# Altium PCB USB-NST.PcbDoc
Units mil, origin at the board's own origin, x right, y up, seen from the top; angles counter-clockwise.
Board outline 1496.06 x 1255.91 mil, 2 copper layers (Top Layer, Bottom Layer); 37 components, 0 nets, 180 pads, 40 vias.
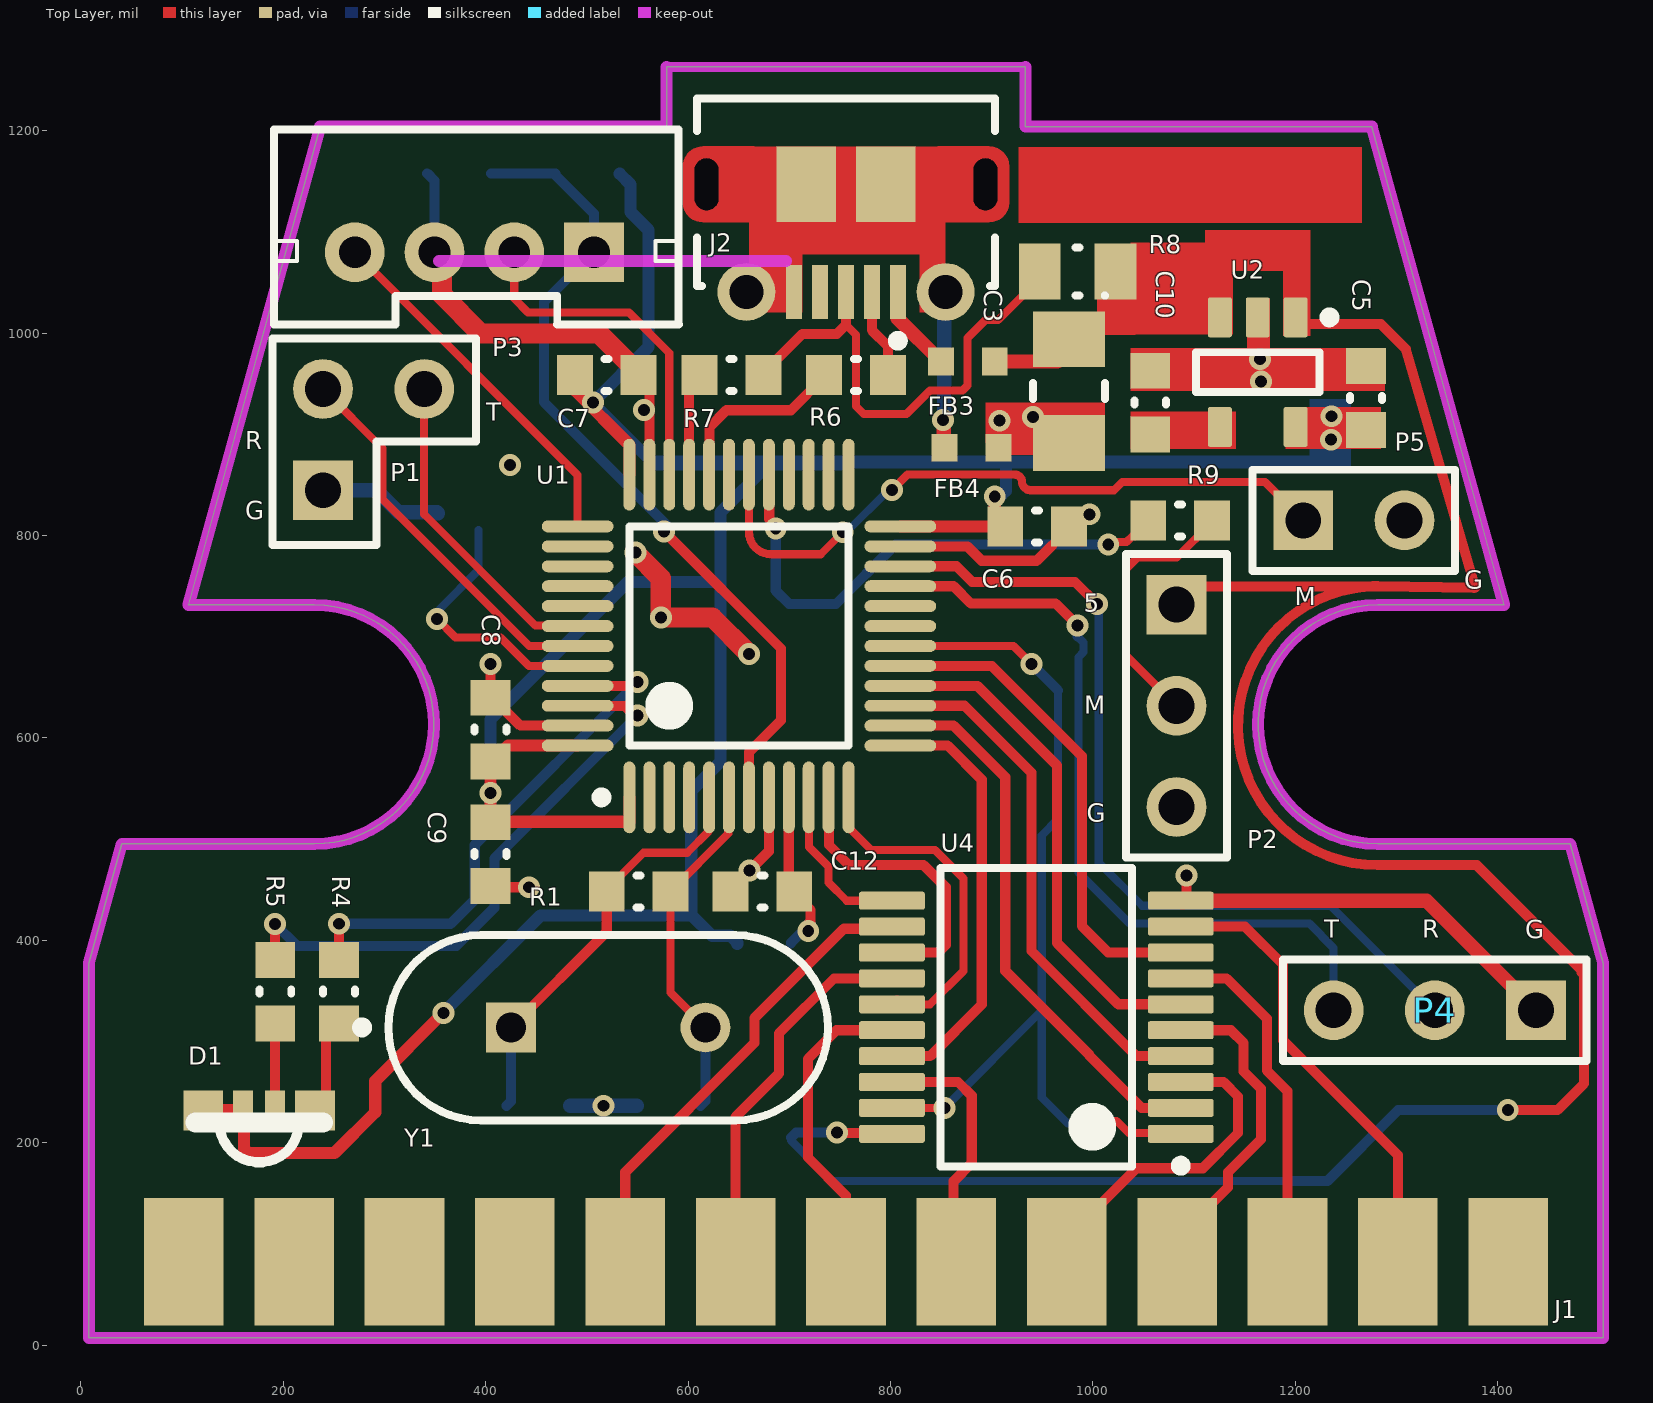
[diagram p0: Top Layer view]
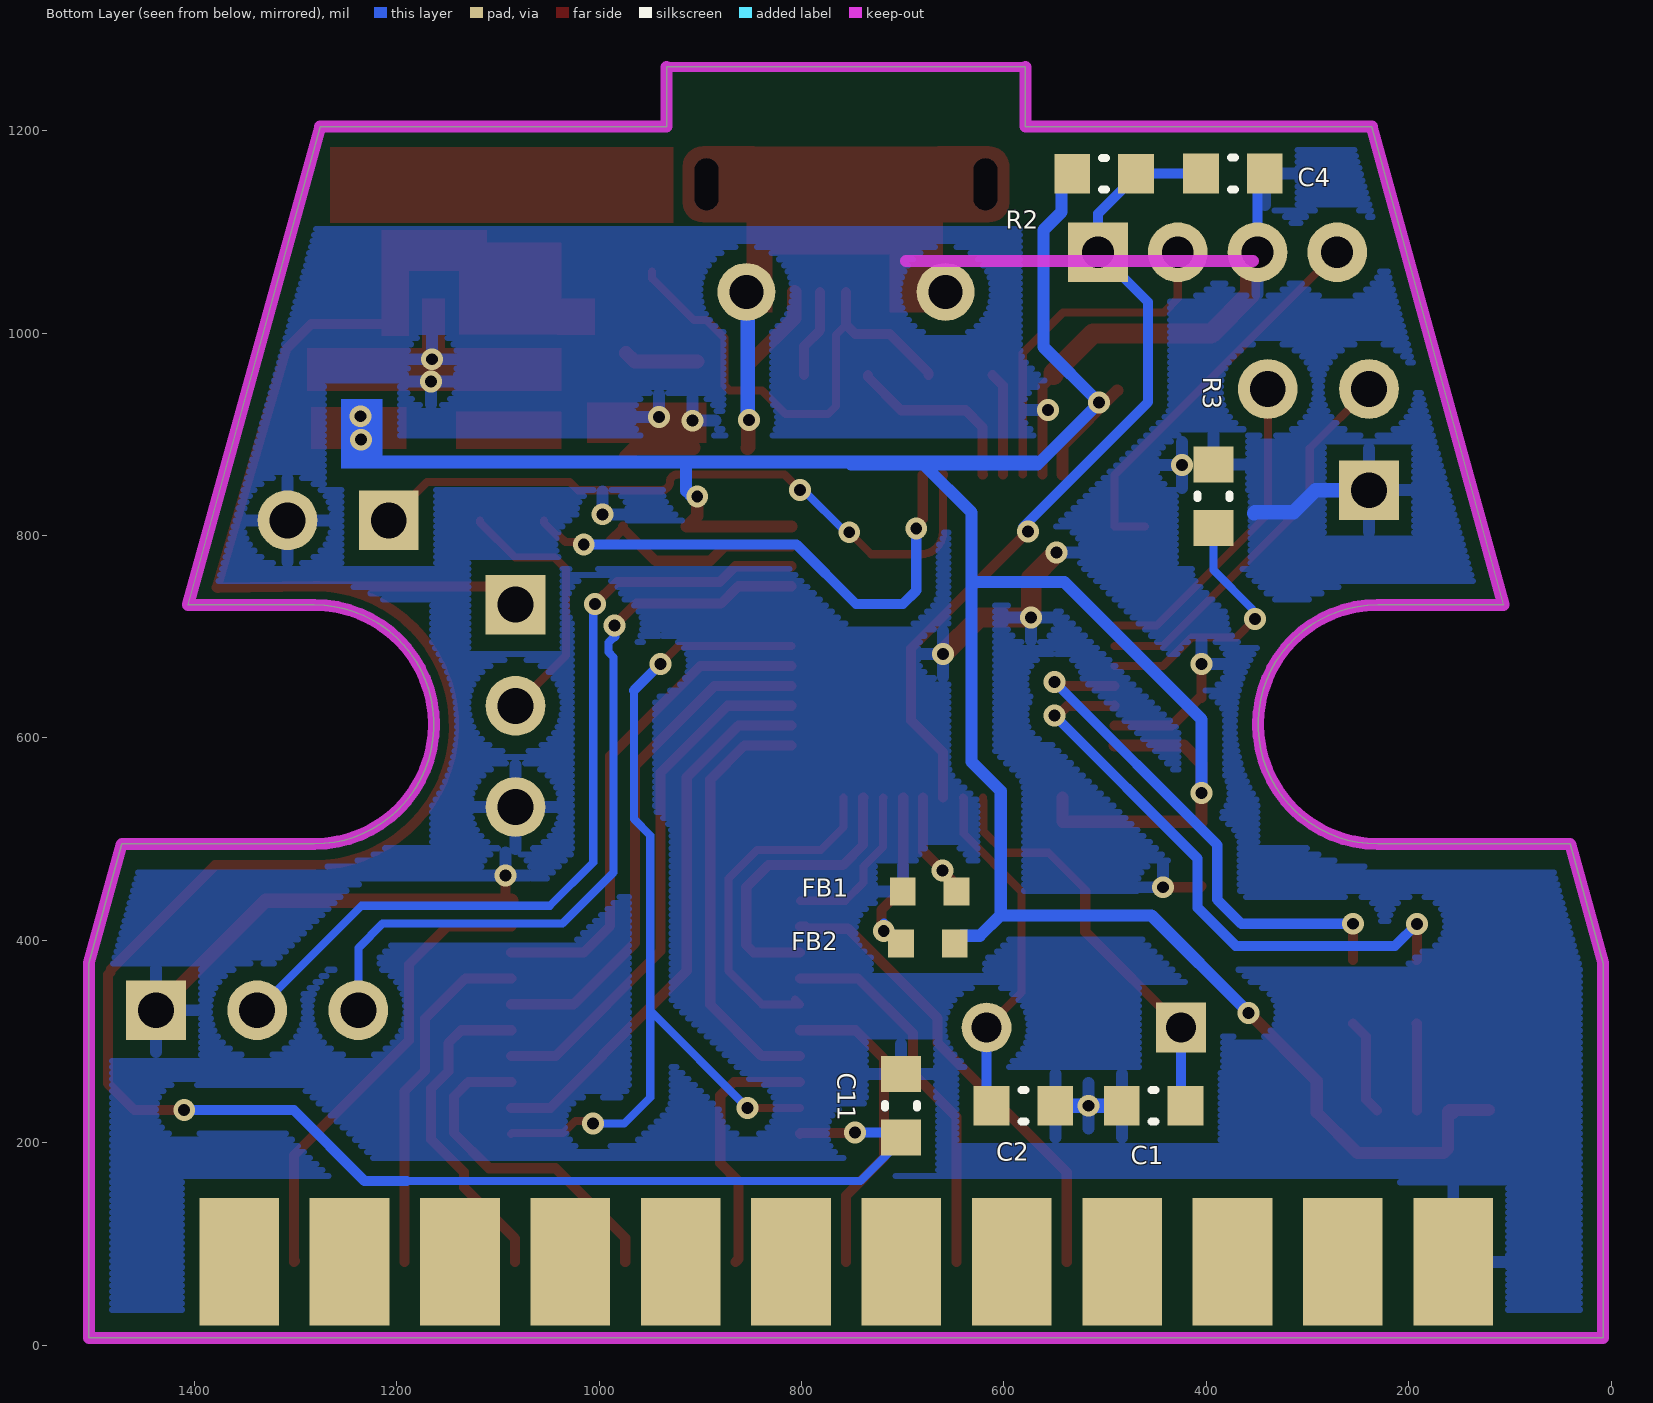
[diagram p1: Bottom Layer view, seen from below]

## Layer stack, top to bottom
Top Solder: solder mask 0.4, Solder Resist, Dk 3.5
Top Layer: signal copper 1.4
Dielectric 1: dielectric 12.6, FR-4, Dk 4.8
Bottom Layer: signal copper 1.4
Bottom Solder: solder mask 0.4, Solder Resist, Dk 3.5

## Board outline
7.99,7.1 7.99,377.18 40.61,495.29 230.71,495.29 ccw(c230.71,613.4) 230.71,731.51 106.33,731.51 236.34,1203.95 236.34,1204.14 578.86,1204.14 578.86,1263.01 933.19,1263.01 933.19,1203.95 1275.71,1203.95 1406.19,731.51 1281.33,731.51 ccw(c1281.33,613.4) 1281.33,495.29 1471.43,495.29 1504.05,377.18 1504.05,7.1

## Design rules (kind name [scope] priority, off if disabled: settings)
Clearance [All] p1: gap=10 ignorepadtopadclearanceinfootprint=FALSE except(0: Arc-Hole Track-Hole SMDPad-Hole THPad-Hole Via-Hole Fill-Hole Poly-Hole Region-Hole Text-Hole)
PolygonConnect [All] p1: connectstyle=Relief reliefconductorwidth=10 reliefentries=4 polygonreliefangle="90 Angle" airgapwidth=10
RoutingVias [All] p1: holewidth=28 width=50 viastyle="Through Hole" minholewidth=28 minwidth=50 maxholewidth=28 maxwidth=50
SolderMaskExpansion [All] p1: expansion=4 istentingtop=FALSE
Width [All] p1: maxlimit=10 minlimit=10 preferedwidth=10
30 further rules are at their usual default settings.

## Components (designator, comment, footprint, x,y, rotation, side; value= is the part's Value field where it differs from the comment)
C1 "CAP 22pF" CAPC0603(1608)100_N 452.03,236.59 r0 bottom value=22pF
C2 "CAP 22pF" CAPC0603(1608)100_N 580.72,236.59 r180 bottom value=22pF
C3 "TAJA106K016RNJ" CAPMP3217X18-T_V 976.34,942.67 r270 top
C4 "CAP 1uF 25V" CAPC0603(1608)100_N 373.69,1157.88 r0 bottom value=1uF
C5 "CAP 2.2uF 16V" CAPC0603(1608)55_N 1269.68,935.85 r270 top value=2.2uF
C6 "CAP 100nF 6.3V" CAPC0603(1608)100_N 944.84,808.98 r180 top value=100nF
C7 "CAP 100nF 6.3V" CAPC0603(1608)100_N 519.57,958.55 r180 top value=100nF
C8 "CAP 100nF 6.3V" CAPC0603(1608)100_N 404.67,608.27 r270 top value=100nF
C9 "CAP 100nF 6.3V" CAPC0603(1608)100_N 404.67,485.27 r90 top value=100nF
C10 "CAP 10nF 16V" CAPC0603(1608)100_N 1056.66,931.28 r270 top value=10nF
C11 "CAP 100nF 6.3V" CAPC0603(1608)100_N 701.68,236.59 r270 bottom value=100nF
C12 "CAP 100nF 6.3V" CAPC0603(1608)100_N 673.34,448.16 r0 top value=100nF
D1 "Bi-Color LED" LED_Bi_Color_1204 176.11,220.01 r270 top
FB1 "BLM18PG600SN1J" MURA-BLM18PG_KG-CHIP-2_V2 673.34,448.16 r0 bottom
FB2 "BLM18PG600SN1J" MURA-BLM18PG_KG-CHIP-2_V2 675.11,396.72 r0 bottom
FB3 "BLM18PG600SN1J" MURA-BLM18PG_KG-CHIP-2_V2 876.41,971.87 r180 top
FB4 "BLM18PG600SN1J" MURA-BLM18PG_KG-CHIP-2_V2 880,886.76 r180 top
J1 "D Connector 25" DB25-EDGE-Female-S 756.02,82.3 r0 top
J2 "105017-0001" USB-MICRO-B_V 756.02,1093.86 r180 top locked
P1 "Header 4" PH2.0-LI-4P 388.83,1079.92 r180 top
P2 "Header 3" HDR1X3#1 1082.59,731.72 r270 top
P3 "MHDR1X3" HDR1X3#2 439.24,944.79 r180 top
P4 "Header 3" HDR1X3#1 1437.85,330.92 r180 top
P5 "Header 2" HDR1X2 1207.79,815 r0 top
R1 "1M 1%" RESC0603(1608)_N 551.06,448.16 r180 top value="1000000.00 Ohm"
R2 "10K 1% 0603(1608)" RESC0603(1608)_N 500.93,1157.46 r0 bottom value="10000.00 Ohm"
R3 "10K 1%" RESC0603(1608)_N 393.07,838.82 r270 bottom value="10000.00 Ohm"
R4 "1K 1%" RESC0603(1608)_N 255,349.25 r270 top value="1000.00 Ohm"
R5 "1K 1%" RESC0603(1608)_N 192.13,349.25 r270 top value="1000.00 Ohm"
R6 "27R 1%" RESC0603(1608)_N 765.87,958.55 r0 top value="27.00 Ohm"
R7 "27R 1%" RESC0603(1608)_N 642.89,958.55 r0 top value="27.00 Ohm"
R8 "1K5 1%" RESC0805(2012)_N 984.92,1061 r0 top value="1500.00 Ohm"
R9 "100R 1%" RESC0603(1608)_N 1086.12,815 r0 top value="100.00 Ohm"
U1 "STM32F103C8T6" STM-LQFP48_N 650.29,700.71 r90 top
U2 "LP2985A-33DBVT" DBV0005A_N 1162.85,961.43 r270 top
U4 "SN74HCT244DBR" DB0020A_N 944.09,324.02 r180 top
Y1 "ADA2214" ADAI-THHF-49S3 521.02,313.95 r0 top

## Footprints (in the part's own frame and the unit in brackets; to place one, negate y for a bottom-side part, rotate by r counter-clockwise, add the part's x,y. Pads: shape width x height; smd on the part's side, far side on the other; paste and mask are expansions set on the pad)
ADAI-THHF-49S3 [mm] "THD, 2-Leads, Body 11.05x4.65mm, Pitch 4.88mm"
  rect 1.25x1.25 hole 0.75: 1(-2.44,0)
  round 1.25 hole 0.75: 2(2.44,0)
  silkscreen extent -6.3,-2.34 5.52,2.33, body extent -5.53,-2.34 5.53,2.33, height 3.5
CAPC0603(1608)55_N [mm] "Chip Capacitor, Body 1.6x0.8mm, Height 0.55mm, IPC Medium Density"
  rect 0.9x1 smd: 1(-0.8,0) 2(0.8,0)
  silkscreen extent -0.05,-0.4 0.05,0.4, body extent -0.87,-0.48 0.88,0.47, height 0.55
CAPC0603(1608)100_N [mm] "Chip Capacitor, Body 1.6x0.8mm, Height 1.0mm, IPC Medium Density"
  rect 0.9x1 smd: 1(-0.8,0) 2(0.8,0)
  silkscreen extent -0.05,-0.4 0.05,0.4, body extent -0.87,-0.48 0.88,0.47, height 1
CAPMP3217X18-T_V [mm] "Molded Capacitor, 2-Leads, Body 3.40x1.8mm"
  rect 1.4x1.8 smd: 1(-1.3,0) 2(1.3,0)
  silkscreen extent -2.45,-0.9 0.2,0.95, body extent -1.92,-0.9 1.92,0.9, height 1.8
DB0020A_N [mm] "SOP, 20-Leads, Body 5.6x7.5mm, Pitch 0.65mm, IPC Medium Density"
  rrect22% 1.65x0.45 smd: 1(-3.625,2.925) 2(-3.625,2.275) 3(-3.625,1.625) 4(-3.625,0.975) 5(-3.625,0.325) 6(-3.625,-0.325) 7(-3.625,-0.975) 8(-3.625,-1.625) 9(-3.625,-2.275) 10(-3.625,-2.925) 11(3.625,-2.925) 12(3.625,-2.275) 13(3.625,-1.625) 14(3.625,-0.975) 15(3.625,-0.325) 16(3.625,0.325) 17(3.625,0.975) 18(3.625,1.625) 19(3.625,2.275) 20(3.625,2.925)
  silkscreen extent -3.75,-3.75 2.4,3.85, body extent -3.91,-3.6 3.91,3.6, height 1.91
DB25-EDGE-Female-S [mm] "D-SUB- 25P, MALE, SOLDER BUCKET"
  rect 2x3.2 smd: 1(16.62,0) 2(13.85,0) 3(11.08,0) 4(8.31,0) 5(5.54,0) 6(2.77,0) 7(0,0) 8(-2.77,0) 9(-5.54,0) 10(-8.31,0) 11(-11.08,0) 12(-13.85,0) 13(-16.62,0)
  rect 2x3.2 smd far side: 14(15.23,0) 15(12.46,0) 16(9.69,0) 17(6.92,0) 18(4.15,0) 19(1.38,0) 20(-1.39,0) 21(-4.16,0) 22(-6.93,0) 23(-9.7,0) 24(-12.47,0) 25(-15.24,0)
DBV0005A_N [mm] "SOT23, 5-Leads, Body 3.05x1.75mm, Pitch 0.95mm, IPC Medium Density"
  rrect17% 1x0.6 smd: 1(-1.375,0.95) 2(-1.375,0) 3(-1.375,-0.95) 4(1.375,-0.95) 5(1.375,0.95)
  silkscreen extent -1.5,-1.55 0.5,1.93, body extent -1.42,-1.46 1.42,1.46, height 1.08
HDR1X2 [mm] "Connector; Header; 2 Position"
  rect 1.5x1.5 hole 0.9: 1(0,0)
  round 1.5 hole 0.9: 2(2.54,0)
  silkscreen extent -1.27,-1.27 3.81,1.27
HDR1X3#1 [mm] "Connector; Header; 3 Position"
  rect 1.5x1.5 hole 0.9: 1(0,0)
  round 1.5 hole 0.9: 2(2.54,0) 3(5.08,0)
  silkscreen extent -1.27,-1.27 6.35,1.27
HDR1X3#2 [mm] "Connector; Header; 3 Position"
  rect 1.5x1.5 hole 0.9: 1(5.08,2.54)
  round 1.5 hole 0.9: 2(2.54,0) 3(5.08,0)
  silkscreen extent 1.24,-1.27 6.35,3.91
LED_Bi_Color_1204 [mm]
  rect 1x0.5 smd: 1(-0.3,0.4) 2(-0.3,-0.4)
  rect 1x1 smd: 3(-0.3,1.4) 4(-0.3,-1.4)
  silkscreen extent 0,-1.6 1,1.6, body extent -0.25,-1.6 1,1.6, height 1
MURA-BLM18PG_KG-CHIP-2_V2 [mm] "Chip Ferrite Bead, 2-Leads, Body 1.6x0.8mm, Height 0.95mm, Reflow, 0.5 to 1.5A Rated Current"
  rect 0.65x0.7 smd: 1(-0.675,0) 2(0.675,0)
  body extent -0.8,-0.4 0.8,0.4, height 0.95
PH2.0-LI-4P [mm] "长：9.9mm，宽：4.7mm，高：6mm"
  rect 1.5x1.5 hole 0.8: 1(-3,0)
  round 1.5 hole 0.8: 2(-1,0) 3(1,0) 4(3,0)
  silkscreen extent -5.13,-3.08 5.03,1.82, body extent -4.95,-3 4.95,1.7, height 6.01
RESC0603(1608)_N [mm] "Chip Resistor, Body 1.6x0.8mm, IPC Medium Density"
  rect 0.9x1 smd: 1(-0.8,0) 2(0.8,0)
  silkscreen extent -0.05,-0.4 0.05,0.4, body extent -0.85,-0.47 0.85,0.47, height 0.6
RESC0805(2012)_N [mm] "Chip Resistor, Body 2.0x1.3mm, IPC Medium Density"
  rect 1.05x1.4 smd: 1(-0.95,0) 2(0.95,0)
  silkscreen extent -0.05,-0.6 0.05,0.6, body extent -1.1,-0.67 1.1,0.68, height 0.7
STM-LQFP48_N [mm] "QFP, 48-Leads, Body 7x7mm, Pitch 0.5mm, IPC Medium Density"
  oval 1.8x0.3 smd: 1(-4.05,2.75) 2(-4.05,2.25) 3(-4.05,1.75) 4(-4.05,1.25) 5(-4.05,0.75) 6(-4.05,0.25) 7(-4.05,-0.25) 8(-4.05,-0.75) 9(-4.05,-1.25) 10(-4.05,-1.75) 11(-4.05,-2.25) 12(-4.05,-2.75) 25(4.05,-2.75) 26(4.05,-2.25) 27(4.05,-1.75) 28(4.05,-1.25) 29(4.05,-0.75) 30(4.05,-0.25) 31(4.05,0.25) 32(4.05,0.75) 33(4.05,1.25) 34(4.05,1.75) 35(4.05,2.25) 36(4.05,2.75)
  oval 0.3x1.8 smd: 13(-2.75,-4.05) 14(-2.25,-4.05) 15(-1.75,-4.05) 16(-1.25,-4.05) 17(-0.75,-4.05) 18(-0.25,-4.05) 19(0.25,-4.05) 20(0.75,-4.05) 21(1.25,-4.05) 22(1.75,-4.05) 23(2.25,-4.05) 24(2.75,-4.05) 37(2.75,4.05) 38(2.25,4.05) 39(1.75,4.05) 40(1.25,4.05) 41(0.75,4.05) 42(0.25,4.05) 43(-0.25,4.05) 44(-0.75,4.05) 45(-1.25,4.05) 46(-1.75,4.05) 47(-2.25,4.05) 48(-2.75,4.05)
  silkscreen extent -4.17,-2.75 2.75,3.57, body extent -3.5,-3.5 3.5,3.5, height 1.6
USB-MICRO-B_V [mm] "USB, MICRO B, Body 7.491x4.695 mm, Pitch 0.65 mm"
  rect 0.4x1.35 smd: 1(-1.3,1.35) 2(-0.65,1.35) 3(0,1.35) 4(0.65,1.35) 5(1.3,1.35)
  round 1.45 hole 0.85: 6(-2.5,1.35) 7(2.5,1.35)
  rrect50% 0x0 hole 0.6 slot 1.3 at 90 deg: 8(-3.5,-1.35) 11(3.5,-1.35)
  rect 1.5x1.9 smd: 9(-1,-1.35) 10(1,-1.35)
  Top Layer circle w0.5: c3.6,-1.8 r0.25
  Top Layer circle w0.5: c-3.6,-1.8 r0.25
  Top Layer region: -2.3,-2.3 -2.3,-0.4 -3.6,-0.4 -3.6,-2.3
  Top Layer region: 2.3,-0.4 2.3,-2.3 3.6,-2.3 3.6,-0.4
  Top Layer region: 3.6,-0.9 3.6,-1.8 4.1,-1.8 4.1,-0.9
  Top Layer region: -3.6,-1.8 -3.6,-0.9 -4.1,-0.9 -4.1,-1.8
  Top Layer lines w0.5: 3.6,-1.15 ccw(c3.6,-0.9) 3.35,-0.9 ccw(c3.6,-0.9) 3.6,-1.15 ; -3.546,-1.144 ccw(c-3.6,-0.9) -3.85,-0.9 ccw(c-3.6,-0.9) -3.546,-1.144
  silkscreen extent -3.75,-3.5 3.75,2.7, body extent -4.1,-3.9 4.1,1.5, height 2.67

## Part data
C1 C2: library part CMP-1035-00809-1, "CAP 22pF 16V ±10% 0603 (1608 Metric) Thickness 1mm SMD", Case-EIA=0603, Case-Metric=1608, Rated Voltage="16 V", Tolerance=Â±10%, Max Thickness="1 mm", Technology=SMT
C3: library part CMP-1661-00004-1, "Standard Tantalum, 10 uF, +/- 10%, 16 V, -55 to 125 degC, 2-Pin SMD (1206), RoHS, Tape and Reel", Case\Package=SOT-26, Frequency="300 MHz", Max Operating Temperature="150 degC", Max Power Dissipation="300 mW", Min Operating Temperature="-55 degC", Package Quantity=3000, ComponentLink1Description="Manufacturer URL", ComponentLink1URL=http://www.avx.com/, ComponentLink2Description=Datasheet, ComponentLink2URL=http://datasheets.avx.com/TAJ.pdf, ComponentLink3Description="Package Specification", ComponentLink3URL=http://www.avx.com/download/software/literature/AVX-Footprint-Library.pdf, DatasheetVersion=Feb-16, Elements=2, Height="1.3 mm", hFE Min=60, Length="3.1 mm", Mount="Surface Mount", PackageDescription="2-Pin Surface Mount Device, Body 3.2 x 1.65 mm", PackageReference=CAPMP3217X18-T, Packaging="Tape and Reel", Pins=6, Radiation Hardening=No, REACH SVHC="No SVHC", RoHSCompliant=true, Vce Max="500 mV", Width="1.7 mm"
C4: library part CMP-1035-02741-1, "CAP 1uF 25V ±20% 0603 (1608 Metric) Thickness 1mm SMD", Case-EIA=0603, Case-Metric=1608, Rated Voltage="25 V", Tolerance=Â±20%, Max Thickness="1 mm", Technology=SMT
C5: library part CMP-1035-02764-1, "CAP 2.2uF 16V ±20% 0603 (1608 Metric) Thickness 0.55mm SMD", Case-EIA=0603, Case-Metric=1608, Rated Voltage="16 V", Tolerance=Â±20%, Max Thickness="0.55 mm", Technology=SMT
C6 C7 C8 C9 C11 C12: library part CMP-1035-02576-1, "CAP 100nF 6.3V ±10% 0603 (1608 Metric) Thickness 1mm SMD", Case-EIA=0603, Case-Metric=1608, Rated Voltage="6.3 V", Tolerance=Â±10%, Max Thickness="1 mm", Technology=SMT
C10: library part CMP-1035-02310-1, "CAP 10nF 16V ±5% 0603 (1608 Metric) Thickness 1mm SMD", Case-EIA=0603, Case-Metric=1608, Rated Voltage="16 V", Tolerance=Â±5%, Max Thickness="1 mm", Technology=SMT
D1: library part LED-RG-KAAK-4, "LED Indicator, Red / Green, 2 V, -40 to 100 degC, 4-Pin SMD, RoHS, Tape and Reel", Emitting Color=YellowGreen/Red, Forward Current=30mA, Forward Voltage=2.6V, Manufacturer=Dialight, Operating Temperature Classification=Industrial, Operating Temp Range=-55Cto100C, Package Description="4-Pin Surface Mount Device, Body 4.32 x 8.77 mm, Pitch 1.5 mm", Package Reference=591-3001-013F, Package Type=SMD, Power Dissipation=100W, Reverse Voltage=5V, Test Current (It)=20mA, Datasheet URL=https://datasheet.ciiva.com/2132/c17245-2132277.pdf, Datasheet Version="Rev. B, 10/2010", DELETED=Compliant, Dominant Wave Length=570/628nm, High Brightness=No, Lens Dimensions=2.8x2.8x2.7mm, Lens Type=NonDiffused, Luminous Intensity=8/6.5mcd, Lum Intensity=8/6.5mcd, Main Category=ChipLED, Manufacturer URL=http://www.dialight.com/, Mounting=SurfaceMount, Mounting Technology=SurfaceMount, Number of  Elements=2, Packaging=TapeandReel, Pin Count=2, Product Depth (mm)=8.8mm, Product Height (mm)=5mm, Product Length (mm)=4.3mm, Rad Hardened=No, Shape Type=Circular, Type=Bi-Color, Viewing Angle=40deg
FB1 FB2 FB3 FB4: library part CMP-0686-00574-2, "Chip Ferrite Bead for Power Lines, 60 Ohm, 500 mA, -55 to 125 degC, 1.6 x 0.8 x 0.95 mm SMD, Tape and Reel", DC Resistance="0.10 Ohm Max.", Manufacturer=Murata, Operating Temperature Range="-55 to 125 degC", Rated Current="500 mA", ComponentLink1Description="Manufacturer URL", ComponentLink1URL=http://www.murata.com/, ComponentLink2Description=Datasheet, ComponentLink2URL=http://www.murata.com/products/catalog/pdf/c31e.pdf, ComponentLink3Description="Package Specification", ComponentLink3URL=http://www.murata.com/products/catalog/pdf/c31e.pdf, DatasheetVersion=08/2013, Impedance (at 100 MHz)="60 Ohm Typ.", Mounting Technology="Surface Mount", PackageDescription="2-Pin Chip, Body 1.6 x 0.8 mm", PackageReference=BLM18_H950-2, Packing="Tape and Reel", PartNumber=BLM18PG600SN1J
J1: "Receptacle Assembly, 25 Position, Right Angle", PackageDocument=U, DatasheetDocument=19-Mar-1999, Gender=Receptacle, LatestRevisionDate=17-Jul-2002, LatestRevisionNote="Re-released for DXP Platform.", Orientation="Right Angle", PackageReference=787202, Positions=25, Published=15-Jun-2001, Publisher="Altium Limited"
J2: library part CMP-2000-05827-1, "Micro-USB B Receptacle, Right Angle, Bottom Mount, Surface Mount, with Solder Tabs, -30 to 85 degC, 5-Pin USB, RoHS, Tape and Reel", Manufacturer=Molex, Package Description="5-Leads USB, Micro B, Body 7.5 x 5 mm, Pitch 0.65 mm", Package Reference=MICRO-B, Package Version="Rev. F, 12/2012", Standard Package=1, Voltage - Max=30V, 3D Model=105017-0001.stp, Catalog Drawings=1050170001, Category=Connectors,Interconnects, Circuits=5, Connector Type=USB-microB, Datasheet URL=http://www.molex.com/elqNow/elqRedir.htm?ref=http://www.molex.com/webdocs/datasheets/pdf/en-us/1050170001_IO_CONNECTORS.pdf, Datasheet Version=03/2016, Family=USB,DVI,HDMIConnectors, Featured Product=Micro-USBConnectorsUSBConnectors, Features=Shielded,SolderRetention, Gender=Receptacle, Ingress Protection=-, Manufacturer URL=http://www.molex.com/, Mating Products=WM17145-ND-CABLEMICROUSBBTOSTDA1.0MWM17147-ND-CABLEMICROUSBBTOSTDA2.0MWM17146-ND-CABLEMICROUSBBTOSTDA1.5M, Mounting Technology=SurfaceMount, Mounting Type=BoardCutout,SurfaceMount,RightAngle, Number of Contacts=5, Online Catalog=Molex-MicroUSB, Other Names=WM1399DKR, Package URL=http://www.molex.com/pdm_docs/sd/1050170001_sd.pdf, Packaging=Digi-Reel®, PCN Assembly/Origin=ResinSupplier21/Oct/2015, RoHS Information=1050170001CertofCompliance, Series=-, Specifications=-
P1: "Header, 4-Pin", LatestRevisionDate=17-Jul-2002, LatestRevisionNote="Re-released for DXP Platform.", Publisher="Altium Limited"
P2 P3 P4: "Header, 3-Pin", LatestRevisionDate=17-Jul-2002, LatestRevisionNote="Re-released for DXP Platform.", Publisher="Altium Limited"
P5: "Header, 2-Pin", LatestRevisionDate=17-Jul-2002, LatestRevisionNote="Re-released for DXP Platform.", Publisher="Altium Limited"
R1: library part CMP-1012-00849-1, "1M 0.1W 1% 0603 (1608 Metric)  SMD", Case-EIA=0603, Case-Metric=1608, Power="0.1 W", Tolerance="1 %", Technology=SMT
R2 R3: library part CMP-1012-00623-1, "10K 0.1W 1% 0603 (1608 Metric)  SMD", Case-EIA=0603, Case-Metric=1608, Power="0.1 W", Tolerance="1 %", Technology=SMT
R4 R5: library part CMP-1012-00510-1, "1K 0.1W 1% 0603 (1608 Metric)  SMD", Case-EIA=0603, Case-Metric=1608, Power="0.1 W", Tolerance="1 %", Technology=SMT
R6 R7: library part CMP-1012-00331-1, "27R 0.1W 1% 0603 (1608 Metric)  SMD", Case-EIA=0603, Case-Metric=1608, Power="0.1 W", Tolerance="1 %", Technology=SMT
R8: library part CMP-1013-00528-1, "1K5 0.125W 1% 0805 (2012 Metric)  SMD", Case-EIA=0805, Case-Metric=2012, Power="0.125 W", Tolerance="1 %", Technology=SMT
R9: library part CMP-1012-00397-1, "100R 0.1W 1% 0603 (1608 Metric)  SMD", Case-EIA=0603, Case-Metric=1608, Power="0.1 W", Tolerance="1 %", Technology=SMT
U1: library part CMP-0237-00215-3, "ARM Cortex-M3 32-bit MCU, 64 KB Flash, 20 KB Internal RAM, 37 I/Os, 48-pin LQFP, -40 to 85 degC, Tray", I/Os (High Current)=37, Operating Frequency(F) (Processor speed) (MHz)=72, Supply Voltage(Vcc) min (V)=2, A/D Converter="2x12-bit (10 Channel)", ComponentLink1Description="Manufacturer URL", ComponentLink1URL=http://www.st.com/web/en/home.html, ComponentLink2Description=Datasheet, ComponentLink2URL=http://www.st.com/st-web-ui/static/active/en/resource/technical/document/datasheet/CD00161566.pdf, ComponentLink3Description="Package Specification", ComponentLink3URL=http://www.st.com/st-web-ui/static/active/en/resource/technical/document/datasheet/DM00058181.pdf, Core="ARM Cortex-M3", DatasheetVersion="Rev. 16", FLASH Size (Prog) (kB)=64, Internal RAM Size (kB)=20, Mounting Technology="Surface Mount", PackageDescription="48-Pin Low Profile Quad Flat Package, 7 x 7 mm Body, 0.5 mm Pitch", PackageReference=LQFP48, PackageVersion="Rev. 6, 06/2013", Packing=Tray, PartId=1, PartNumber=STM32F103C8T6
U2: library part CMP-0758-00051-2, "Single Output Low Noise LDO, 150 mA, Fixed 3.3 V Output, 1% Tolerance, 2.2 to 16 V Input, Low IQ, 5-Pin SOT-23 (DBV), -40 to 125 degC, Green (RoHS & no Sb/Br), Tape and Reel", Manufacturer="Texas Instruments", Operating Temperature Range (degC)="-40 to 125", Accuracy (%)=1, ComponentLink1Description="Manufacturer URL", ComponentLink1URL=http://www.ti.com/, ComponentLink2Description=Datasheet, ComponentLink2URL=http://www.ti.com/lit/ds/symlink/lp2985-50.pdf, ComponentLink3Description="Package Specification", ComponentLink3URL=http://www.ti.com/litv/pdf/mpds018j, DatasheetVersion=SLVS522N, Fixed Output Options (V)=3.3, Iout (Max) (A)=0.15, Iq (Typ) (mA)=0.85, Mounting Technology="Surface Mount", Output Options="Fixed Output", PackageDescription="5-Pin Plastic Small Outline, Body 2.9 x 1.6 mm, Pitch 0.95 mm", PackageReference=DBV0005A, PackageVersion=4073253-4/L, Packing="Tape and Reel", PartNumber=LP2985A-33DBVT, RoHS=TRUE, Vdo (Typ) (mV)=280, Vin (V)="2.2 to 16"
U4: library part CMP-0440-00427-3, "Octal Buffers And Line Drivers With 3-State Outputs, DB0020A, LARGE T&R", F @ Nom Voltage(Max)(Mhz)=25, Generic Part Number=SN74HCT244, ICC @ Nom Voltage(Max)(mA)=0.08, Manufacturer="Texas Instruments", Operating Temperature Range(C)="-40 to 85", Rating=Catalog, tpd @ Nom Voltage(Max)(ns)=32, Voltage(Nom)(V)=5, Bits(#)=8, Code_JEDEC=MO-150, DatasheetVersion=SCLS175D, Input Type=TTL, Output Type=CMOS, PackageReference=DB0020A, PackageVersion=http://www.ti.com/lit/ml/mpds508/mpds508.pdf, PartId=1, VCC(Max)(V)=5.5, VCC(Min)(V)=4.5
Y1: library part CMP-1740-00004-1, "Crystal, 12 MHz, 18 pF, 30 PPM, -20 to 70 degC, 2-Pin THD, RoHS", Case\Package=PDIP, Max Dual Supply Voltage="15 V", Max Operating Temperature="70 degC", Max Supply Voltage="30 V", Min Dual Supply Voltage="1.75 V", Min Operating Temperature="0 degC", Min Supply Voltage="3.5 V", Nominal Dual Supply Voltage="12 V", Nominal Supply Current="7.5 mA", Nominal Voltage Gain="106.02 dB", Package Quantity=50, Channels=1, ComponentLink1Description="Manufacturer URL", ComponentLink1URL=https://www.adafruit.com/, ComponentLink2Description=Datasheet, ComponentLink2URL=https://cdn-shop.adafruit.com/product-files/2214/2214datasheet.pdf, DatasheetVersion=Nov-14, Elements=1, Height="4.57 mm", Length="9.81 mm", Mount="Through Hole", Nominal Supply Voltage="12 V", PackageDescription="2-Pin Through Hole Device, Body 11.05 x 4.65 mm, Pitch 4.88 mm", PackageReference=THHF-49S3, Packaging=Rail/Tube, Pins=8, Propagation Delay="115 ns", Radiation Hardening=No, REACH SVHC="No SVHC", RoHSCompliant=true, Weight="0.015535 oz", Width="6.35 mm"

## Via types
v1: diameter 21.65, hole 11.81, Top Layer to Bottom Layer, 40 vias

## Nets (pads, with @x,y where several pads share a name; then routed paths per layer and width w, separated by ;. In a path a pad name is that pad's centre, name@x,y a point inside that pad or via, vN(x,y) a via of type N, cw(c..) or ccw(c..) an arc to the next point about the centre after c; other vN are vias at no path point)
pads on no net: C1.1 C1.2 C2.1 C2.2 C3.1 C3.2 C4.1 C4.2 C5.1 C5.2 C6.1 C6.2 C7.1 C7.2 C8.1 C8.2 C9.1 C9.2 C10.1 C10.2 C11.1 C11.2 C12.1 C12.2 D1.1 D1.2 D1.3 D1.4 FB1.1 FB1.2 FB2.1 FB2.2 FB3.1 FB3.2 FB4.1 FB4.2 J1.1 J1.2 J1.3 J1.4 J1.5 J1.6 J1.7 J1.8 J1.9 J1.10 J1.11 J1.12 J1.13 J1.14 J1.15 J1.16 J1.17 J1.18 J1.19 J1.20 J1.21 J1.22 J1.23 J1.24 J1.25 J2.1 J2.2 J2.3 J2.4 J2.5 J2.6 J2.7 J2.8 J2.9 J2.10 J2.11 P1.1 P1.2 P1.3 P1.4 P2.1 P2.2 P2.3 P3.1 P3.2 P3.3 P4.1 P4.2 P4.3 P5.1 P5.2 R1.1 R1.2 R2.1 R2.2 R3.1 R3.2 R4.1 R4.2 R5.1 R5.2 R6.1 R6.2 R7.1 R7.2 R8.1 R8.2 R9.1 R9.2 U1.1 U1.2 U1.3 U1.4 U1.5 U1.6 U1.7 U1.8 U1.9 U1.10 U1.11 U1.12 U1.13 U1.14 U1.15 U1.16 U1.17 U1.18 U1.19 U1.20 U1.21 U1.22 U1.23 U1.24 U1.25 U1.26 U1.27 U1.28 U1.29 U1.30 U1.31 U1.32 U1.33 U1.34 U1.35 U1.36 U1.37 U1.38 U1.39 U1.40 U1.41 U1.42 U1.43 U1.44 U1.45 U1.46 U1.47 U1.48 U2.1 U2.2 U2.3 U2.4 U2.5 U4.1 U4.2 U4.3 U4.4 U4.5 U4.6 U4.7 U4.8 U4.9 U4.10 U4.11 U4.12 U4.13 U4.14 U4.15 U4.16 U4.17 U4.18 U4.19 U4.20 Y1.1 Y1.2
copper on no net: | length 23176.4
  Top Layer w8: 239.24,944.79 297.81,886.23 297.81,836.09 443.04,690.87 490.84,690.87 ; 270.72,1079.92 490.84,859.81 490.84,808.98 460.68,808.98 ; 339.24,944.79 339.24,821.06 449.02,711.28 490.11,711.28 490.84,710.55 ; v1(352.09,717.48) 370.18,699.4 414.71,699.4 442.92,671.18 490.84,671.18 ; 428.2,1079.92 428.2,1034.05 441.87,1020.38 541.52,1020.38 581.39,980.52 581.39,860.16 ; 519.57,448.16 519.57,450.13 555.99,486.56 599.15,486.56 620.03,507.43 620.03,537.55 620.76,538.28 620.76,541.26 ; 617.09,313.95 582.56,348.48 582.56,448.16 582.56,448.44 639.71,505.59 639.71,540.53 640.44,541.26 ; 660.13,860.16 660.13,803.41 ccw(c682.03,803.41) 682.03,781.51 731.08,781.51 v1(752.83,803.25) v1@754.14,803.25 ; 719.18,541.26 719.54,540.91 719.54,492.33 738.87,473 738.87,457.02 756.71,439.18 801.37,439.18 ; 756.02,1008.23 765.87,998.38 765.87,927.78 773.57,920.07 815.83,920.07 839.2,943.44 871.26,943.44 875.95,948.13 875.95,995.12 893.82,1013 906.41,1013 947.52,1054.11 947.52,1061 ; 758.55,541.26 758.55,511.73 780.95,489.33 843.83,489.33 872.16,461 872.16,369.77 839.2,336.81 801.37,336.81 806.23,341.67 ; 801.37,234.45 v1(853.22,234.45) ; v1(801.37,844.79) 816.74,860.16 923.05,860.16 cw(c923.05,853.32) 929.89,853.32 ccw(c938.42,853.32) 938.42,844.79 1020.9,844.79 1028.94,852.83 1169.95,852.83 1207.79,815 ; 809.73,690.87 921.58,690.87 v1(939.23,673.22) ; v1(1006.02,218.95) 1008.54,221.47 1023.49,221.47 1035.41,209.55 1086.12,209.55 1086.81,208.86 ; v1(1015.17,791) 1017.78,793.61 1033.24,793.61 1038.94,799.31 1040.91,799.31 1054.62,813.03 1054.62,815 ; 1082.59,631.72 1032.65,681.65 1032.65,767 1043.9,778.24 1082.83,778.24 1117.62,813.03 1117.62,815
  Top Layer w10: 191.86,231.82 191.86,317.49 192.13,317.76 ; v1(191.86,416.24) 191.86,381.01 192.13,380.75 ; 231.23,231.82 242.28,242.87 242.28,305.04 255,317.76 ; 255,380.75 v1(255,416.41) ; 404.67,453.77 405.95,452.5 v1(442.92,452.5) ; v1(404.67,673.22) 404.67,639.76 406.64,639.76 434.28,612.13 490.84,612.13 ; 424.96,313.95 519.57,408.56 519.57,448.16 ; 490.84,631.81 491.18,631.47 537.68,631.47 546.9,622.25 v1(550.05,622.25) ; 490.84,651.5 543.14,651.5 546.9,655.25 v1(550.05,655.25) ; 537.91,82.3 537.91,170.96 665.47,298.52 665.47,323.05 753.89,411.47 793.87,411.47 795.98,413.59 801.37,413.59 ; 551.06,958.55 561.7,947.91 561.7,860.16 ; v1(576.02,804.11) 691.72,688.41 691.72,617.54 660.13,585.95 660.13,541.26 ; 601.07,860.16 601.07,948.23 611.39,958.55 ; 617.09,305.9 617.09,313.95 ; 620.76,860.16 621.1,860.51 621.1,907.11 637.84,923.84 701.63,923.84 734.37,956.58 734.37,958.55 ; 641.85,448.16 641.85,450.13 679.81,488.09 679.81,541.26 ; 646.97,82.3 646.97,225.59 689.66,268.28 689.66,307.91 744.15,362.41 801.37,362.41 ; 657.6,1040.71 704.84,1040.71 704.84,1135.2 ; 660.13,860.16 660.47,859.81 ; 674.39,958.55 674.39,960.52 713.12,999.25 747.04,999.25 756.02,1008.23 756.02,1040.71 ; 679.81,860.16 680.16,859.81 680.16,816.63 ; 699.5,541.26 699.5,453.5 704.84,448.16 704.84,446.19 721.11,429.92 721.11,416.24 720.94,416.41 v1@718.42,416.41 ; 738.87,541.26 739.21,540.92 739.21,494.17 759.05,474.33 832.73,474.33 854.57,452.5 854.57,395.45 847.12,388 801.37,388 ; v1(747.04,210.23) 747.73,209.55 800.69,209.55 801.37,208.86 ; 756.02,82.3 756.02,147.8 718.42,185.4 718.42,282.94 746.7,311.22 801.37,311.22 ; 781.61,1040.71 781.61,1002.95 797.36,987.2 797.36,958.55 ; 801.37,260.04 866.72,260.04 880.22,246.54 880.22,179.99 862.36,162.12 862.36,85.02 865.08,82.3 ; 801.37,285.63 839.2,285.63 890.18,336.61 890.18,558.71 856.44,592.44 809.73,592.44 ; 809.73,612.13 862.4,612.13 913.35,561.18 913.35,369.9 996.76,286.49 996.76,285.81 1048.12,234.45 1086.81,234.45 ; 809.73,631.81 873.13,631.81 939.23,565.71 939.23,389.47 1043.07,285.63 1086.81,285.63 ; 809.73,651.5 885.67,651.5 964.64,572.53 964.64,397.28 1025.1,336.81 1086.81,336.81 ; 809.73,671.18 900.04,671.18 989.06,582.17 989.06,414.11 1015.17,388 1086.81,388 ; 809.73,749.92 862.36,749.92 879.42,732.86 963.18,732.86 v1(984.92,711.13) ; 809.73,769.61 865.3,769.61 880.79,754.12 982.32,754.12 v1(1004.15,732.3) ; 809.73,789.29 875.95,789.29 890.18,775.06 944.39,775.06 976.34,807.01 ; 847.12,1048.04 854.45,1040.71 ; 906.57,886.76 907.08,887.27 907.08,912.93 v1(907.6,913.45) ; 974.13,82.3 974.13,105.92 1043.07,174.85 1108.55,174.85 1143.41,209.71 1143.41,245.76 1129.13,260.04 1086.81,260.04 ; 976.34,808.98 976.34,807.01 ; 989.06,794.29 976.34,807.01 ; 1082.59,731.72 1100.53,749.66 1272.68,749.66 ; 1083.19,82.3 1083.19,105.59 1133.56,155.96 1133.56,170.98 1166.06,203.47 1166.06,253.38 1148.96,270.48 1148.96,298.52 1136.25,311.22 1086.81,311.22 ; 1086.81,362.41 1132.17,362.41 1171.85,322.72 1171.85,271.38 1192.24,251 1192.24,82.3 ; 1086.81,413.59 1150.33,413.59 1187.85,376.06 1187.85,301.35 1301.3,187.91 1301.3,82.3 1300.55,83.04 ; 1092.33,443.04 v1(1092.33,464.04) ; 1200.25,1015.57 1206.93,1008.89 1284.58,1008.89 1309.16,984.3 1377.74,748.78 ; 1376.49,748.42 1281.15,749.92 ccw(c1281.15,612.13) 1272.68,749.66 ; v1(1409.92,232.31) 1459.16,232.31 1485.29,258.44 1485.29,366.14 1482.98,368.45 1482.15,371.45 1379.27,474.33 1281.15,474.33 cw(c1281.15,612.13) 1272.68,749.66
  Top Layer w12: 121,232.34 159.85,232.34 156.52,229.01 ; 160.37,231.82 161.15,231.04 161.15,194.14 165.33,189.95 250.64,189.95 290.83,230.15 290.83,261.06 v1(358.19,328.42) ; 488.07,943.44 542.02,889.5 542.02,860.16 ; 490.84,592.44 422.31,592.44 404.67,574.8 404.67,516.76 405.16,517.25 541.92,517.25 542.02,517.34 542.02,541.26 ; 809.73,808.98 913.35,808.98 902.99,819.34 v1(902.99,838.51)
  Top Layer w14: 807.2,1040.71 807.2,1014.5 849.84,971.87 ; v1(851.71,914.3) 852.57,913.45 852.57,887.61 853.42,886.76 ; 902.99,971.87 964.77,971.87 973.33,980.43 ; 906.57,886.76 964.64,886.76 973.33,878.06 ; 1088.66,437.32 1086.81,439.18 1329.6,439.18 1437.85,330.92
  Top Layer w20: 349.46,1079.92 356.94,1072.45 356.94,1037.9 395.24,999.59 511.99,999.59 551.06,960.52 551.06,958.55 ; v1(548.23,783.19) 548.23,782.74 573.08,757.89 573.08,719.31 v1(573.39,719) 624.13,719 v1(660.13,683)
  Bottom Layer w8: v1(352.09,717.48) 354.71,720.1 354.71,727.62 393.07,765.98 393.07,805.35 ; 701.68,202.14 741.7,162.12 1190.37,162.12 ; v1(752.83,803.25) 756.33,803.25 797.87,844.79 v1(801.37,844.79) ; v1(853.22,234.45) 949.45,330.68 ; 965.67,647 965.67,519.98 949.45,503.76 949.45,330.68 ; 984.92,700.22 990.75,694.4 990.75,684.86 985.63,679.74 985.63,466.95 1036,416.58 1213.84,416.58 1237.85,392.57 1237.85,330.92 ; v1(1004.15,732.3) 1005.75,730.7 1005.75,477.11 1048.69,434.16 1234.61,434.16 1337.85,330.92 ; v1(1006.02,218.95) 975.09,218.95 949.45,244.6 949.45,330.68
  Bottom Layer w10: v1(191.86,416.24) 213.52,394.58 371.01,394.58 408.52,432.09 408.52,480.72 v1(550.05,622.25) ; v1(255,416.41) 365.34,416.41 389.17,440.24 389.17,494.37 v1(550.05,655.25) ; 342.19,1157.88 349.46,1150.61 349.46,1079.92 ; 405.19,1157.88 469.01,1157.88 469.01,1155.91 506.94,1117.98 506.94,1079.92 457.69,1030.66 457.69,931.84 580.72,808.8 v1(576.02,804.11) ; 420.53,236.59 424.96,241.02 424.96,313.95 ; 612.21,236.59 617.09,241.46 617.09,313.95 ; v1(686.63,807.01) 686.63,745.59 699.92,732.3 746.07,732.3 804.77,791 v1(1015.17,791) ; 701.68,205.09 706.83,210.23 v1(747.04,210.23) ; 701.68,396.72 701.68,397.7 718.42,414.44 v1@718.42,416.41 ; v1(939.23,673.22) 965.46,647 965.67,647 ; 984.92,700.22 v1(984.92,711.13) ; 1190.37,162.12 1231.49,162.12 1301.68,232.31 v1(1409.92,232.31)
  Bottom Layer w12: v1(358.19,328.42) 454.28,424.5 603.14,424.5 603.14,425.16 ; v1(404.67,545.64) 404.67,618.39 540.39,754.11 631.98,754.11 ; 532.43,1157.46 543.12,1146.77 543.12,1119.77 560.96,1101.93 560.96,986.34 v1(505.89,931.27) 566.67,870.49 679.56,870.49 ; 648.53,396.72 648.53,397.7 641.74,404.5 623.8,404.5 603.14,425.16 ; 751.08,870.49 679.56,870.49 ; v1(902.99,838.51) 908.34,838.51 913.97,844.13 913.97,870.49 ; 603.14,425.16 603.14,547.6 631.98,576.45 631.98,754.11 ; 631.98,754.11 631.98,822.91 679.56,870.49
  Bottom Layer w14: 239.24,844.79 292.24,844.79 313.98,823.06 351.87,823.06 352.96,821.97 ; 483.52,236.59 v1(516.37,236.59) 549.22,236.59 ; v1(851.71,914.3) 853.08,915.67 853.08,1036.6 851.71,1037.97 854.45,1040.71
  other v1: 718.71,409.4 660.83,469.11 996.76,821 424.04,869.79 1235.45,894.69 940.91,917 1235.75,917.87 556.33,923.84 1166.06,952.27 1164.97,974.2

## Polygon pours and split planes (outlines as drawn)
no net on Bottom Layer "Bottom Layer-GND" (hatched Horizontal grid 6 track 6, remove dead copper, pour order 0): 7.91,6.8 1503.97,6.8 1503.97,494.38 1164.87,494.51 1164.87,731.21 1406.11,731.21 1275.62,1203.65 236.34,1203.95 106.25,731.21 349.38,731.21 349.38,494.99 7.91,494.99

## Keep-outs
Keep-Out Layer:
  lines w10: 578.86,1263.01 933.19,1263.01
  lines w11.81: 354.01,1071.38 696.52,1071.38 ; 578.86,1263.01 578.86,1204.14 236.34,1204.14 236.34,1203.95 106.33,731.51 230.71,731.51 cw(c230.71,613.4) 230.71,495.29 40.61,495.29 7.99,377.18 7.99,7.1 1504.05,7.1 1504.05,377.18 1471.43,495.29 1281.33,495.29 cw(c1281.33,613.4) 1281.33,731.51 1406.19,731.51 1275.71,1203.95 ; 933.19,1263.01 933.19,1203.95 1275.62,1203.95

## Other copper
Top Layer:
  rectangle: 1190.14,885.73 1284.58,926.99
  rectangle: 1110.99,1061.63 1215.12,1101.96
  rectangle: 1187.62,997.01 1215.12,1063.15
  rectangle: 1110.99,998.52 1138.49,1063.15
  rectangle: 1037.22,885.73 1141.58,922.38
  rectangle: 1037.22,942.67 1288.38,985.53
  rectangle: 1152.33,947.33 1174.92,1034.4
  rectangle: 660.13,1020.38 713.12,1078.72
  rectangle: 660.13,1077.62 854.57,1184.41
  rectangle: 828.47,1020.38 854.57,1077.95
  rectangle: 926.53,1108.58 1265.93,1183.88
  rectangle: 1004.15,998.38 1042.27,1034.05
  rectangle: 1037.22,998.52 1111.69,1089.45
  rectangle: 893.82,891.49 1011.77,931.27
Bottom Layer:
  rectangle: 566.67,866.32 1254.85,879.3
  rectangle: 1213.82,879.3 1254.85,935

## Silkscreen, mask and mechanical layers (free items; w line width, h text height)
Top Overlay:
  text "T" at 400.75,907.49 h30
  text "R" at 162.6,879.3 h30
  text "G" at 162.6,810.26 h30
  text "G" at 1366.97,741.71 h30
  text "M" at 1199.22,725 h30
  text "5" at 990.82,718.55 h30
  text "M" at 991.3,618.06 h30
  text "G" at 993.69,511.35 h30
  text "T" at 1228.67,396.54 h30
  text "R" at 1325.19,396.72 h30
  text "G" at 1427.02,396.11 h30
Top Solder:
  text "NS-Trig v3" at 930.92,1150.14 h30
  text "LiuMiao 19.9" at 930.41,1111.94 h30